# Altium PCB Receive.PcbDoc
Units mil, origin at the board's own origin, x right, y up, seen from the top; angles counter-clockwise.
Board outline 905.51 x 2165.35 mil, 2 copper layers (Top Layer, Bottom Layer); 52 components, 37 nets, 238 pads, 55 vias.
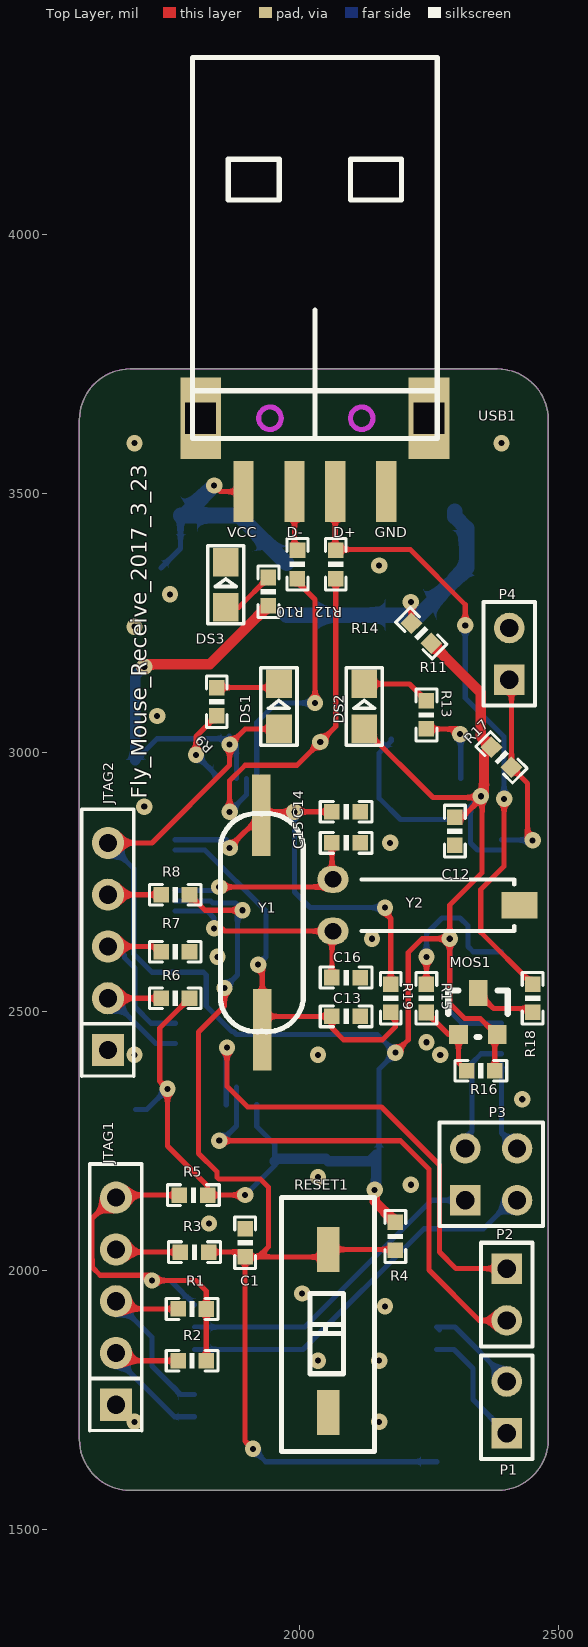
[diagram p0: Top Layer view]
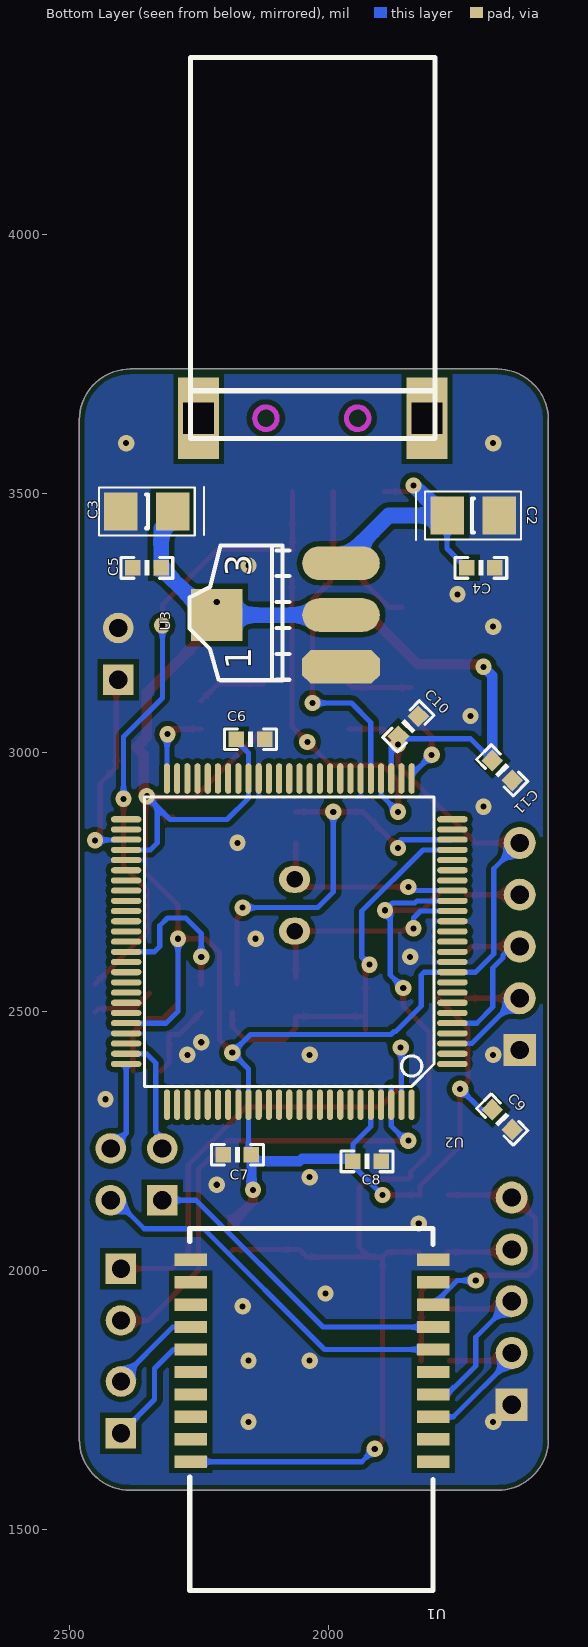
[diagram p1: Bottom Layer view, seen from below]

## Layer stack, top to bottom
Top Solder: solder mask 0.4, Solder Resist, Dk 3.5
Top Layer: signal copper 1.4
Dielectric 1: dielectric 12.6, FR-4, Dk 4.8
Bottom Layer: signal copper 1.4
Bottom Solder: solder mask 0.4, Solder Resist, Dk 3.5

## Board outline
1673.23,1574.8 cw(c1673.23,1673.23) 1574.8,1673.23 1574.8,3641.73 cw(c1673.23,3641.73) 1673.23,3740.16 2381.89,3740.16 cw(c2381.89,3641.73) 2480.32,3641.73 2480.32,1673.23 cw(c2381.89,1673.23) 2381.89,1574.8

## Design rules (kind name [scope] priority, off if disabled: settings)
Clearance [All] p1: gap=10 except(5: SMDPad-SMDPad; 8: Track-Track Track-SMDPad)
HoleSize [All] p1: absolutevalues=TRUE maxlimit=1000 minlimit=1 maxpercent=80.000 minpercent=20.000
MinimumSolderMaskSliver MinimumSolderMaskSliver_LQFQ100 [HasFootprint('TQFP-100')] p1: minsoldermaskwidth=5
MinimumSolderMaskSliver [All] p2: minsoldermaskwidth=10
PolygonConnect [All] p1: connectstyle=Direct reliefconductorwidth=10 reliefentries=4 polygonreliefangle="90 Angle" airgapwidth=10
RoutingVias [All] p1: holewidth=28 width=50 viastyle="Through Hole" minholewidth=28 minwidth=50 maxholewidth=28 maxwidth=50
SilkToSilkClearance [All] p1: silktosilkclearance=0
SilkToSolderMaskClearance [IsPad] p1: minsilkscreentomaskgap=0 clearancetoexposedcopper=TRUE
SolderMaskExpansion [All] p1: expansion=4
Width Width_1 [InNet('VCC_3V3')] p1: maxlimit=1000 minlimit=10 preferedwidth=20 minimp=50.000000 maximp=50.000000 favimp=50.000000
Width [All] p2: maxlimit=10000 minlimit=8 preferedwidth=10
26 further rules are at their usual default settings.

## Components (designator, comment, footprint, x,y, rotation, side; value= is the part's Value field where it differs from the comment)
C1 "104" 0603P 1895,2053 r270 top
C2 "10uF" TAJ_A 1720,3457.19 r180 bottom
C3 "10uF" TAJ_A 2350,3465 r0 bottom
C4 "104" 0603P 1705,3356 r0 bottom
C5 "104" 0603P 2350,3356.13 r180 bottom
C6 "104" 0603P 2150,3025.13 r180 bottom
C7 "104" 0603P 2175,2222.87 r0 bottom
C8 "104" 0603P 1925,2210 r180 bottom
C9 "104" 0603P 1663.92,2290.91 r225 bottom
C10 "104" 0603P 1845,3050 r135 bottom
C11 "104" 0603P 1663.92,2965 r225 bottom
C12 "104" 0603P 2300,2847.62 r270 top
C13 "22" 0603P 2090.06,2490 r180 top
C14 "22" 0603P 2090.06,2885 r180 top
C15 "22" 0603P 2090.06,2825 r180 top
C16 "22" 0603P 2090.06,2565 r180 top
DS1 "" SMDLED 1959.94,3044.97 r90 top
DS2 "" SMDLED 2124.94,3044.97 r90 top
DS3 "POWER" SMDLED 1857.38,3279.97 r90 top
JTAG1 "SWD" HEAD5 1645.49,1940 r90 top
JTAG2 "SWD" HEAD5 1630,2625 r90 top
MOS1 "SI2301" SOT-23 2307,2455 r0 top
P1 "" HDR1X2 2400,2002.88 r270 top
P2 "" HDR1X2 2400,1685 r90 top
P3 "USART1" HDR2X2 2320,2135 r0 top
P4 "Header 2" HDR1X2 2405,3140 r90 top
R1 "10K" 0603P 1792.5,1925.06 r0 top
R2 "10K" 0603P 1792.5,1825.06 r0 top
R3 "33" 0603P 1797,2035 r0 top
R4 "10K" 0603P 2185,2065 r90 top
R5 "0" 0603P 1795,2145 r0 top
R6 "10K" 0603P 1760,2525 r0 top
R7 "10K" 0603P 1760,2615 r0 top
R8 "33" 0603P 1760,2725 r0 top
R9 "510" 0603P 1839.94,3097.5 r90 top
R10 "33" 0603P 1996.01,3363 r270 top
R11 "510" 0603P 2245,3072 r90 top
R12 "33" 0603P 2070,3363 r270 top
R13 "0" 0603P 2235,3230 r315 top
R14 "1K" 0603P 1939.87,3310 r90 top
R15 "1K" 0603P 2245,2525 r270 top
R16 "10K" 0603P 2350,2385 r180 top
R17 "10K" 0603P 2390,2990 r135 top
R18 "1.5K" 0603P 2450,2525 r90 top
R19 "1M" 0603P 2176,2525 r90 top
RESET1 "KEY_M" KEY2 2055,1725.04 r90 top
U1 "ZLG9021P0-1" ZLG9021P0-1 2022.28,1755.16 r0 bottom
U2 "LPC1765" TQFP-100 1760.4,2398.55 r0 bottom locked
U3 "1117" AMS1117 1975.06,3164.97 r90 bottom locked
USB1 "USB_A_M" USB-4-A-SMT-A 1891.73,3503.27 r270 top locked
Y1 "12MHz" 8M 1930,2690 r270 top locked
Y2 "32.768KHz" CRY-32 2065,2655 r0 top

## Footprints (in the part's own frame and the unit in brackets; to place one, negate y for a bottom-side part, rotate by r counter-clockwise, add the part's x,y. Pads: shape width x height; smd on the part's side, far side on the other; paste and mask are expansions set on the pad)
8M [mm]
  rect 4x0.9 smd: 1(-4.775,-0.1) 2(5.725,-0.05)
  silkscreen extent -4.87,-2.11 5.83,1.96
0603P [mil]
  rect 30x30 smd: 1(-27,0) 2(27.5,-0.06)
  silkscreen extent -50,-20 50,20
AMS1117 [mil]
  oct 65x150 smd: 1(0.03,-0.06)
  oval 65x150 smd: 2(100.03,-0.06) 3(200.03,-0.06)
  rect 100x100 smd: 4(100.03,239.94)
  silkscreen extent -26,100 234,293
CRY-32 [mil]
  rect 70x52 smd: 0(359.61,49.61)
  oval 60x52 hole 32: 1(-0.4,-0.39) 2(-0.4,99.61)
  silkscreen extent 55,0 350,100
HDR1X2 [mm]
  rect 1.5x1.5 hole 0.9: 1(0,0)
  round 1.5 hole 0.9: 2(2.54,0)
  silkscreen extent -1.27,-1.27 3.81,1.27
HDR2X2 [mm]
  rect 1.5x1.5 hole 0.9: 1(0,0)
  round 1.5 hole 0.9: 2(0,2.54) 3(2.54,0) 4(2.54,2.54)
  silkscreen extent -1.27,-1.27 3.81,3.81
HEAD5 [mil]
  rect 62x62 hole 35: 1(-200,0)
  round 62 hole 35: 2(-100,0) 3(0,0) 4(100,0) 5(200,0)
  silkscreen extent -250,-50 265,51
KEY2 [mm]
  rect 2.2x1.1 smd: 1(0,0) 2(8,0)
  silkscreen extent -1.91,-2.29 10.54,2.29
SMDLED [mm]
  rect 1.4x1.27 smd: 1(0.001,-0.002) 2(2.211,-0.002)
  silkscreen extent -0.8,-0.89 3.01,0.89
SOT-23 [mil]
  rect 36x36 smd: 1(0,0) 2(75,0)
  rect 36x50 smd: 3(38,80)
  silkscreen extent -20,-5 95,85
TAJ_A [mm] "Chip Capacitor, 2-Leads, Body 3.2x1.7mm, IPC Medium Density"
  rect 1.65x1.85 smd: 1(-1.275,0) 2(1.275,0)
  silkscreen extent -2.79,-1.21 2.35,1.17, body extent -1.7,-0.9 1.7,0.9, height 1.8
TQFP-100 [mm]
  oval 1.5x0.3 smd: 1(-0.01,0.01) 2(-0.01,-0.49) 3(-0.01,-0.99) 4(-0.01,-1.49) 5(-0.01,-1.99) 6(-0.01,-2.49) 7(-0.01,-2.99) 8(-0.01,-3.49) 9(-0.01,-3.99) 10(-0.01,-4.49) 11(-0.01,-4.99) 12(-0.01,-5.49) 13(-0.01,-5.99) 14(-0.01,-6.49) 15(-0.01,-6.99) 16(-0.01,-7.49) 17(-0.01,-7.99) 18(-0.01,-8.49) 19(-0.01,-8.99) 20(-0.01,-9.49) 21(-0.01,-9.99) 22(-0.01,-10.49) 23(-0.01,-10.99) 24(-0.01,-11.49) 25(-0.01,-11.99) 51(15.99,-11.99) 52(15.99,-11.49) 53(15.99,-10.99) 54(15.99,-10.49) 55(15.99,-9.99) 56(15.99,-9.49) 57(15.99,-8.99) 58(15.99,-8.49) 59(15.99,-7.99) 60(15.99,-7.49) 61(15.99,-6.99) 62(15.99,-6.49) 63(15.99,-5.99) 64(15.99,-5.49) 65(15.99,-4.99) 66(15.99,-4.49) 67(15.99,-3.99) 68(15.99,-3.49) 69(15.99,-2.99) 70(15.99,-2.49) 71(15.99,-1.99) 72(15.99,-1.49) 73(15.99,-0.99) 74(15.99,-0.49) 75(15.99,0.01)
  oval 0.3x1.5 smd: 26(1.99,-13.99) 27(2.49,-13.99) 28(2.99,-13.99) 29(3.49,-13.99) 30(3.99,-13.99) 31(4.49,-13.99) 32(4.99,-13.99) 33(5.49,-13.99) 34(5.99,-13.99) 35(6.49,-13.99) 36(6.99,-13.99) 37(7.49,-13.99) 38(7.99,-13.99) 39(8.49,-13.99) 40(8.99,-13.99) 41(9.49,-13.99) 42(9.99,-13.99) 43(10.49,-13.99) 44(10.99,-13.99) 45(11.49,-13.99) 46(11.99,-13.99) 47(12.49,-13.99) 48(12.99,-13.99) 49(13.49,-13.99) 50(13.99,-13.99) 76(13.99,2.01) 77(13.49,2.01) 78(12.99,2.01) 79(12.49,2.01) 80(11.99,2.01) 81(11.49,2.01) 82(10.99,2.01) 83(10.49,2.01) 84(9.99,2.01) 85(9.49,2.01) 86(8.99,2.01) 87(8.49,2.01) 88(7.99,2.01) 89(7.49,2.01) 90(6.99,2.01) 91(6.49,2.01) 92(5.99,2.01) 93(5.49,2.01) 94(4.99,2.01) 95(4.49,2.01) 96(3.99,2.01) 97(3.49,2.01) 98(2.99,2.01) 99(2.49,2.01) 100(1.99,2.01)
  silkscreen extent 0.89,-13.09 15.09,1.11
USB-4-A-SMT-A [mm]
  rect 3x1 smd: 1(0,0) 2(0,2.5) 3(0,4.5) 4(0,7)
  rect 4x2 hole 1.5 square: 5(-3.6,9.1) 6(-3.6,-2.1)
  Keep-Out Layer circle w0.254: c-3.6,1.3 r0.55
  Keep-Out Layer circle w0.254: c-3.6,5.8 r0.55
  silkscreen extent -21.3,-2.5 -2.6,9.5
ZLG9021P0-1 [mm]
  rect 1.6x0.6 smd: 1(-5.715,3.175) 2(-5.715,2.075) 3(-5.715,0.975) 4(-5.715,-0.125) 5(-5.715,-1.225) 6(-5.715,-2.325) 7(-5.715,-3.425) 8(-5.715,-4.525) 9(-5.715,-5.625) 10(-5.715,-6.725) 10(-5.715,-6.725) 11(6.165,-6.725) 11(6.165,-6.725) 12(6.165,-5.625) 13(6.165,-4.525) 14(6.165,-3.425) 15(6.165,-2.325) 16(6.165,-1.225) 17(6.165,-0.125) 18(6.165,0.975) 19(6.165,2.075) 20(6.165,3.175)
  silkscreen extent -5.71,-8.26 6.22,9.5

## Part data
C1 C4 C5 C6 C7 C8 C9 C10 C11 C12 C13 C14 C15 C16: library part C
C2 C3: library part CAP
DS1 DS2 DS3: library part LED2, "Typical RED, GREEN, YELLOW, AMBER GaAs LED"
MOS1: library part MOS-P, "IRLML6401/SI2301"
P1 P2: library part "Header 2"
P3: library part "Header 2X2", "Header, 2-Pin, Dual row"
R1 R2 R3 R4 R5 R6 R7 R8 R9 R10 R11 R12 R13 R14 R15 R16 R17 R18 R19: library part R
Y1 Y2: library part CRYSTAL, "Crystal"

## Via types
v1: diameter 31.5, hole 11.81, Top Layer to Bottom Layer, tented both sides, 52 vias
v2: diameter 31.5, hole 11.81, Top Layer to Bottom Layer, 3 vias

## Nets (pads, with @x,y where several pads share a name; then routed paths per layer and width w, separated by ;. In a path a pad name is that pad's centre, name@x,y a point inside that pad or via, vN(x,y) a via of type N, cw(c..) or ccw(c..) an arc to the next point about the centre after c; other vN are vias at no path point)
9021_TCK: JTAG1.3 R1.1 U1.4 | length 385
  Top Layer w10: JTAG1.3 1660.43,1925.06 R1.1
  Bottom Layer w10: JTAG1.3 1715,1870.49 1715,1815 1769.92,1760.08 U1.4
9021_TMS: JTAG1.2 R2.1 U1.3 | length 335.2
  Top Layer w10: JTAG1.2 1660.43,1825.06 R2.1
  Bottom Layer w10: JTAG1.2 1645.49,1829.51 1758.23,1716.77 U1.3
9201_RX0: P3.3 U1.6 | length 732.1
  Bottom Layer w10: U1.6 2006.69,1846.69 2240,2080 2355,2080 P3.3@2410,2135
9201_TX0: P3.1 U1.7 | length 614.2
  Bottom Layer w10: U1.7 2010,1890 2255,2135 P3.1@2310,2135
D+: R12.1 R18.2 USB1.3 | length 1242
  Top Layer w10: USB1.3 2068.9,3391.1 R12.1 2071.42,3391.42 2213.58,3391.42 2320,3285 v2(2320,3245) ; v2@2395,2920 v2(2395,2910) 2395,2780 2350,2735 2350,2652.56 R18.2
  Bottom Layer w10: v2(2320,3245) 2320,3105 2395,3030 v2(2395,2910)
GND: C1.1 C2.2 C3.2 C4.1 C5.1 C6.2 C7.2 C8.2 C9.2 C10.2 C11.2 C12.2 C13.1 C14.1 C15.1 C16.1 DS3.2 JTAG1.1 JTAG2.1 P4.2 R7.2 RESET1.1 U1.10 U1.11 U2.11 U2.15 U2.31 U2.41 U2.55 U2.72 U2.83 U2.97 U3.1 USB1.4
  other v1: 1681.22,1707.13 2153.66,1707.13 2035.55,1825.24 2153.66,1825.24 2165,1930 2005,1955 1825,2090 2215,2165 2035.55,2179.57 2430,2330 1681.22,2415.79 2035.55,2415.79 2271.77,2415.79 2245,2440 1841.58,2604.94 2140,2640 2175,2825 1700,2895 1725,3070 1681.22,3242.56 1750,3305 2153.66,3360.67 1681.22,3596.89 2389.88,3596.89
ISP: P4.1 R17.1 U2.53 | length 389.2
  Top Layer w10: P4.1 2409.09,3135.91 R17.1 2440,2940 2440,2840 v1(2450,2830)
  Bottom Layer w10: U2.53 2390.7,2830.44 2449.56,2830.44 v1(2450,2830)
LED0: R9.1 U2.26 | length 153.8
  Top Layer w10: v1(1800,2995) 1800,3030.56 R9.1
  Bottom Layer w10: v1(1800,2995) 1838.74,2956.26 U2.26
LED1: R11.1 U2.50 | length 155.3
  Top Layer w10: R11.1 2300,3045 v1(2310,3035)
  Bottom Layer w10: v1(2310,3035) 2311.18,3033.82 U2.50
LPC_RX0: P1.1 U2.99 | length 970.7
  Top Layer w10: v1(1860,2430) 1860,2355 1900,2315 2158.28,2315 2270,2203.28 2270,2035 2302.12,2002.88 P1.1
  Bottom Layer w10: U2.99 1858.42,2428.42 v1(1860,2430)
LPC_RX1: P3.2 U2.74 | length 238.9
  Bottom Layer w10: P3.2@2310,2235 2310,2245 2332.84,2267.84 2332.84,2400 2350.67,2417.84 U2.74
LPC_TX0: P1.2 U2.98 | length 932.8
  Top Layer w10: v1(1845,2250) 2195,2250 2250,2195 2250,2000 2347.12,1902.88 P1.2
  Bottom Layer w10: v1(1845,2250) 1850,2250 1878.11,2278.11 U2.98 1878.11,2353.11
LPC_TX1: P3.4 U2.75 | length 175.6
  Bottom Layer w10: U2.75 2389.92,2265.08 P3.4
NetC2_1: C2.1 C4.2 U3.3 USB1.1 | length 503.1
  Top Layer w10: v1(1835,3515) 1846.73,3503.27 USB1.1
  Bottom Layer w10: C4.2 1770.2,3393.76 C2.1 ; C2.1@1777.19,3457.19 C2.1@1778.69,3457.19
  Bottom Layer w30: C2.1 1777.19,3457.19 v1(1835,3515) ; C2.1@1778.69,3457.19 1882.81,3457.19 U3.3
NetC3_1: C3.1 C5.2 R13.1 U3.2 U3.4 | length 544.8
  Top Layer w10: v1(2215,3290) 2215.91,3289.09 R13.1
  Bottom Layer w30: U3.2 U3.4 2231.44,3265 C5.2 2322.5,3432.3 2299.8,3455 C3.1
NetDS1_2: DS1.2 R9.2 | length 122.9
  Top Layer w10: R9.2 1952.99,3125 DS1.2
NetDS2_2: DS2.2 R11.2 | length 133.5
  Top Layer w10: DS2.2 2212.56,3132.01 R11.2
NetDS3_1: DS3.1 R14.2 | length 106.3
  Top Layer w10: DS3.1 1882.44,3280 R14.2
NetJTAG1_4: JTAG1.4 R3.1 | length 126.6
  Top Layer w10: JTAG1.4 1650.49,2035 R3.1
NetMOS1_1: MOS1.1 R15.2 R16.2 | length 156
  Top Layer w10: R15.2 2287.44,2455 MOS1.1 2307,2400.56 R16.2
NetMOS1_3: MOS1.3 R18.1 | length 120.3
  Top Layer w10: MOS1.3 2375,2505 2443,2505 R18.1
NetR10_1: R10.1 USB1.2 | length 115.7
  Top Layer w10: USB1.2 1990.16,3395.85 R10.1
OSC_32K_IN: C16.2 U2.16 Y2.1 | length 422.8
  Top Layer w10: v1(1835,2660) 1850,2660 1855.39,2654.61 Y2.1 2062.56,2652.57 C16.2
  Bottom Layer w10: U2.16 1821.57,2693.43 1835,2680 v1(1835,2660)
OSC_32K_OUT: C15.2 U2.18 Y2.2 | length 395.8
  Top Layer w10: v1(1845,2740) 2040.9,2740 Y2.2@2062.56,2761.66 ; C15.2 Y2.2@2062.56,2761.66 ; Y2.2 2062.56,2756.66 Y2.2@2062.56,2761.66 ; Y2.2@2069.6,2754.61 Y2.2@2062.56,2761.66
  Bottom Layer w10: U2.18 1837.8,2732.8 v1(1845,2740)
OSC_IN: C13.2 R19.1 U2.22 Y1.2 | length 786.7
  Top Layer w10: v1@1920,2585 1928.03,2576.97 Y1.2@1928.03,2485 ; Y1.2 Y1.2@1928.03,2485 ; R19.1@2185,2498 2185,2470 2160,2445 2085,2445 2062.56,2467.44 C13.2 1933.1,2490.06 Y1.2@1928.03,2485
  Bottom Layer w10: U2.22 1816.95,2811.54 1935,2693.48 1935,2605 v1(1920,2590)
OSC_OUT: C14.2 R19.2 U2.23 Y1.1 | length 821
  Top Layer w10: v1(1865,2815) 1865,2816.93 Y1.1 1933.13,2885.06 C14.2 ; v1(2165,2700) 2165,2690 2176.07,2678.93 R19.2
  Bottom Layer w10: U2.23 1858.78,2831.22 ; v1(1990,2885) 1990,2730 2020,2700 v1(2165,2700)
P2_9: R15.1 U2.64 | length 305.8
  Top Layer w10: R15.1 v2(2245,2605)
  Bottom Layer w10: v2(2245,2605) 2245,2650 2275,2680 2310,2680 2325,2665 2325,2625 2335.31,2614.69 U2.64
RESET: C1.2 R3.2 R4.1 R8.2 RESET1.2 U1.20 U2.17 | length 2181.2
  Top Layer w10: R8.2 1817.44,2695 v1(1890,2695) ; R3.2 1885.5,2034.94 C1.2 ; v1(1855,2545) 1855,2510 1805,2460 1805,2225.46 1840.5,2189.96 1840.5,2179.5 1844.25,2175.75 1924.25,2175.75 1940,2160 1940,2045 1920.5,2025.5 ; v1(1910,1655) 1894.94,1670.06 C1.2 ; R4.1 2183,2040 RESET1.2 2040.5,2025.5 1920.5,2025.5 ; C1.2 1920.5,2025.5
  Bottom Layer w10: U2.17 1828.41,2713.11 1832.26,2709.25 1875.75,2709.25 v1(1890,2695) 1880,2685 1880,2570 v1(1855,2545) ; v1(1910,1655) 1934.84,1630.16 U1.20
RX1: P2.1 U1.15 | length 237.1
  Bottom Layer w10: U1.15 2298.31,1846.69 2335,1810 2335,1750 P2.1
TCK: JTAG2.3 R7.1 U2.5 | length 345.4
  Top Layer w10: JTAG2.3 1723,2625 R7.1
  Bottom Layer w10: JTAG2.3 1645,2625 1662,2608 1662,2603.17 1682,2583.17 1682,2508 1713.11,2476.89 U2.5
TMS: JTAG2.2 R6.1 U2.3 | length 269.2
  Top Layer w10: JTAG2.2 R6.1
  Bottom Layer w10: JTAG2.2 1635,2525 1722.48,2437.52 U2.3
TRST: JTAG2.4 R8.1 | length 103
  Top Layer w10: JTAG2.4 R8.1
TX1: P2.2 U1.14 | length 188.5
  Bottom Layer w10: U1.14@2270,1885 U1.14 2300,1890 2400,1790 P2.2
USB_D+: R12.2 U2.29 | length 671.9
  Top Layer w10: v1(1865,2885) 1865,2945 1895,2975 1995,2975 v1(2040,3020) 2069.94,3049.94 R12.2
  Bottom Layer w10: v1(1865,2885) 1897.79,2917.79 U2.29
USB_D-: R10.2 U2.30 | length 490.8
  Top Layer w10: R10.2 1995.95,3329.05 2030,3295 v1(2030,3095)
  Bottom Layer w10: U2.30 1917.48,3057.48 1955,3095 v1(2030,3095)
VCC_3V3: C6.1 C7.1 C8.1 C9.1 C10.1 C11.1 C12.1 DS1.1 DS2.1 JTAG2.5 MOS1.2 R4.2 R5.2 R6.2 R13.2 R14.1 R16.1 R17.2 U2.10 U2.28 U2.42 U2.54 U2.71 U2.84 U2.96 | length 5773.6
  Top Layer w10: JTAG2.5 1715,2825 1865,2975 v1(1865,3015) 1895,3045 DS1.1 ; v1(1700,3165) v1@1705,3170 ; R6.2 1730,2467.44 1730,2365 v1(1745,2350) 1745,2240 1822.5,2162.5 R5.2 1894.94,2144.94 v1(1895,2145) ; DS2.1 2257.5,2912.5 v1@2352.5,2912.5 ; v1(2185,2420) 2210,2445 2210,2613.48 2236.52,2640 v1(2290,2640) ; C12.1 2314.62,2874.62 v1@2352.5,2912.5 ; R16.1 2377,2450 MOS1.2 2380,2455 2349,2486 2319,2486 2290,2515 v1(2290,2640) ; v1(2290,2640) 2290,2705 2352.5,2767.5 v1@2352.5,2912.5
  Top Layer w20: v1@1705,3170 1826.87,3170 R14.1 ; v1(2145,2155) 2145,2132.56 R4.2 ; R13.2 2350,3114.91 2350,3030.09 R17.2 2356.11,2995 2356.11,2916.11 v1@2352.5,2912.5
  Bottom Layer w10: JTAG2.5 1680,2775 1680,2610.63 1715.32,2575.32 U2.10 1814.68,2575.32 1820,2570 1820,2510 1869.25,2460.75 1872.74,2460.75 1878.48,2455 2150,2455 v1(2185,2420) 2153.7,2388.7 U2.84 2153.7,2228.57 C7.1 ; C9.1 1705,2310 v1(1745,2350) ; C11.1 1725,3026.08 C10.1@1853.92,3026.08 ; C10.1 1870,3025 1865,3020 v1(1865,3015) ; U2.28 v1@1878.11,3015 ; v1(1895,2145) 1952,2202 C8.1 1952,2243 1917.48,2277.52 U2.96 ; C6.1 2177,3022 2153.7,2998.7 U2.42 2153.7,2911.3 2195,2870 2305,2870 2330,2895 ; v1(2290,2640) 2290,2500 2313.11,2476.89 U2.71 ; v1(2350,2915) 2330,2895 ; U2.54 2343.46,2811.54 2330,2825 2330,2895
  Bottom Layer w20: C11.1 1683.01,3148.01 v1(1700,3165) ; C8.1 1957.32,2215.32 2050.36,2215.32 2055.67,2210 2135.13,2210 C7.1 2148,2158 v1(2145,2155)
VCC_BLE: JTAG1.5 R1.2 R2.2 R5.1 U1.8 U1.9 | length 757.3
  Top Layer w10: R5.1 1650.49,2145 JTAG1.5 1640.05,2140 1599.49,2099.44 1599.49,2020.44 1600,2019.93 1600,2005 1615,1990 1705,1990 v1(1715,1980) 1800,1980 1820,1960 R1.2 R2.2
  Bottom Layer w10: v1(1715,1980) 1750.59,1980 U1.8
pads on no net: U1.1 U1.2 U1.5 U1.12 U1.13 U1.16 U1.17 U1.18 U1.19 U2.1 U2.2 U2.4 U2.6 U2.7 U2.8 U2.9 U2.12 U2.13 U2.14 U2.19 U2.20 U2.21 U2.24 U2.25 U2.27 U2.32 U2.33 U2.34 U2.35 U2.36 U2.37 U2.38 U2.39 U2.40 U2.43 U2.44 U2.45 U2.46 U2.47 U2.48 U2.49 U2.51 U2.52 U2.56 U2.57 U2.58 U2.59 U2.60 U2.61 U2.62 U2.63 U2.65 U2.66 U2.67 U2.68 U2.69 U2.70 U2.73 U2.76 U2.77 U2.78 U2.79 U2.80 U2.81 U2.82 U2.85 U2.86 U2.87 U2.88 U2.89 U2.90 U2.91 U2.92 U2.93 U2.94 U2.95 U2.100 USB1.5 USB1.6 Y2.0

## Polygon pours and split planes (outlines as drawn)
GND on Bottom Layer "Top Layer-No Net" (solid, remove dead copper, pour order 2): 1673.23,1574.8 cw(c1673.23,1673.23) 1574.8,1673.23 1574.8,3641.73 cw(c1673.23,3641.73) 1673.23,3740.16 2381.89,3740.16 cw(c2381.89,3641.73) 2480.32,3641.73 2480.32,1673.23 cw(c2381.89,1673.23) 2381.89,1574.8

## Keep-outs
Keep-Out Layer:
  the board outline again, w0.5

## Silkscreen, mask and mechanical layers (free items; w line width, h text height)
Top Overlay:
  text "Fly_Mouse_Receive_2017_3_23" at 1705,2910 h30 r90

## Text inside footprints (layer, text, board x,y; h text height)
U3: Bottom Overlay "3" at 2148,3339 h50 r270; Bottom Overlay "1" at 2148,3159 h50 r270
USB1: Top Overlay "VCC" at 1860,3415 h20; Top Overlay "GND" at 2145,3415 h20; Top Overlay "D-" at 1975,3415 h20; Top Overlay "D+" at 2065,3415 h20